# Altium PCB FCM_Integrated.PcbDoc (part 2 of 3)
Units mil, origin at the board's own origin, x right, y up, seen from the top; angles counter-clockwise.
Board outline 5855 x 4354 mil, 4 copper layers (Top Layer, Power, Ground, Bottom Layer), stack 23.756 mil thick; 164 components, 92 nets, 619 pads, 176 vias.
Unrouted connection lines stored in the file: 150.
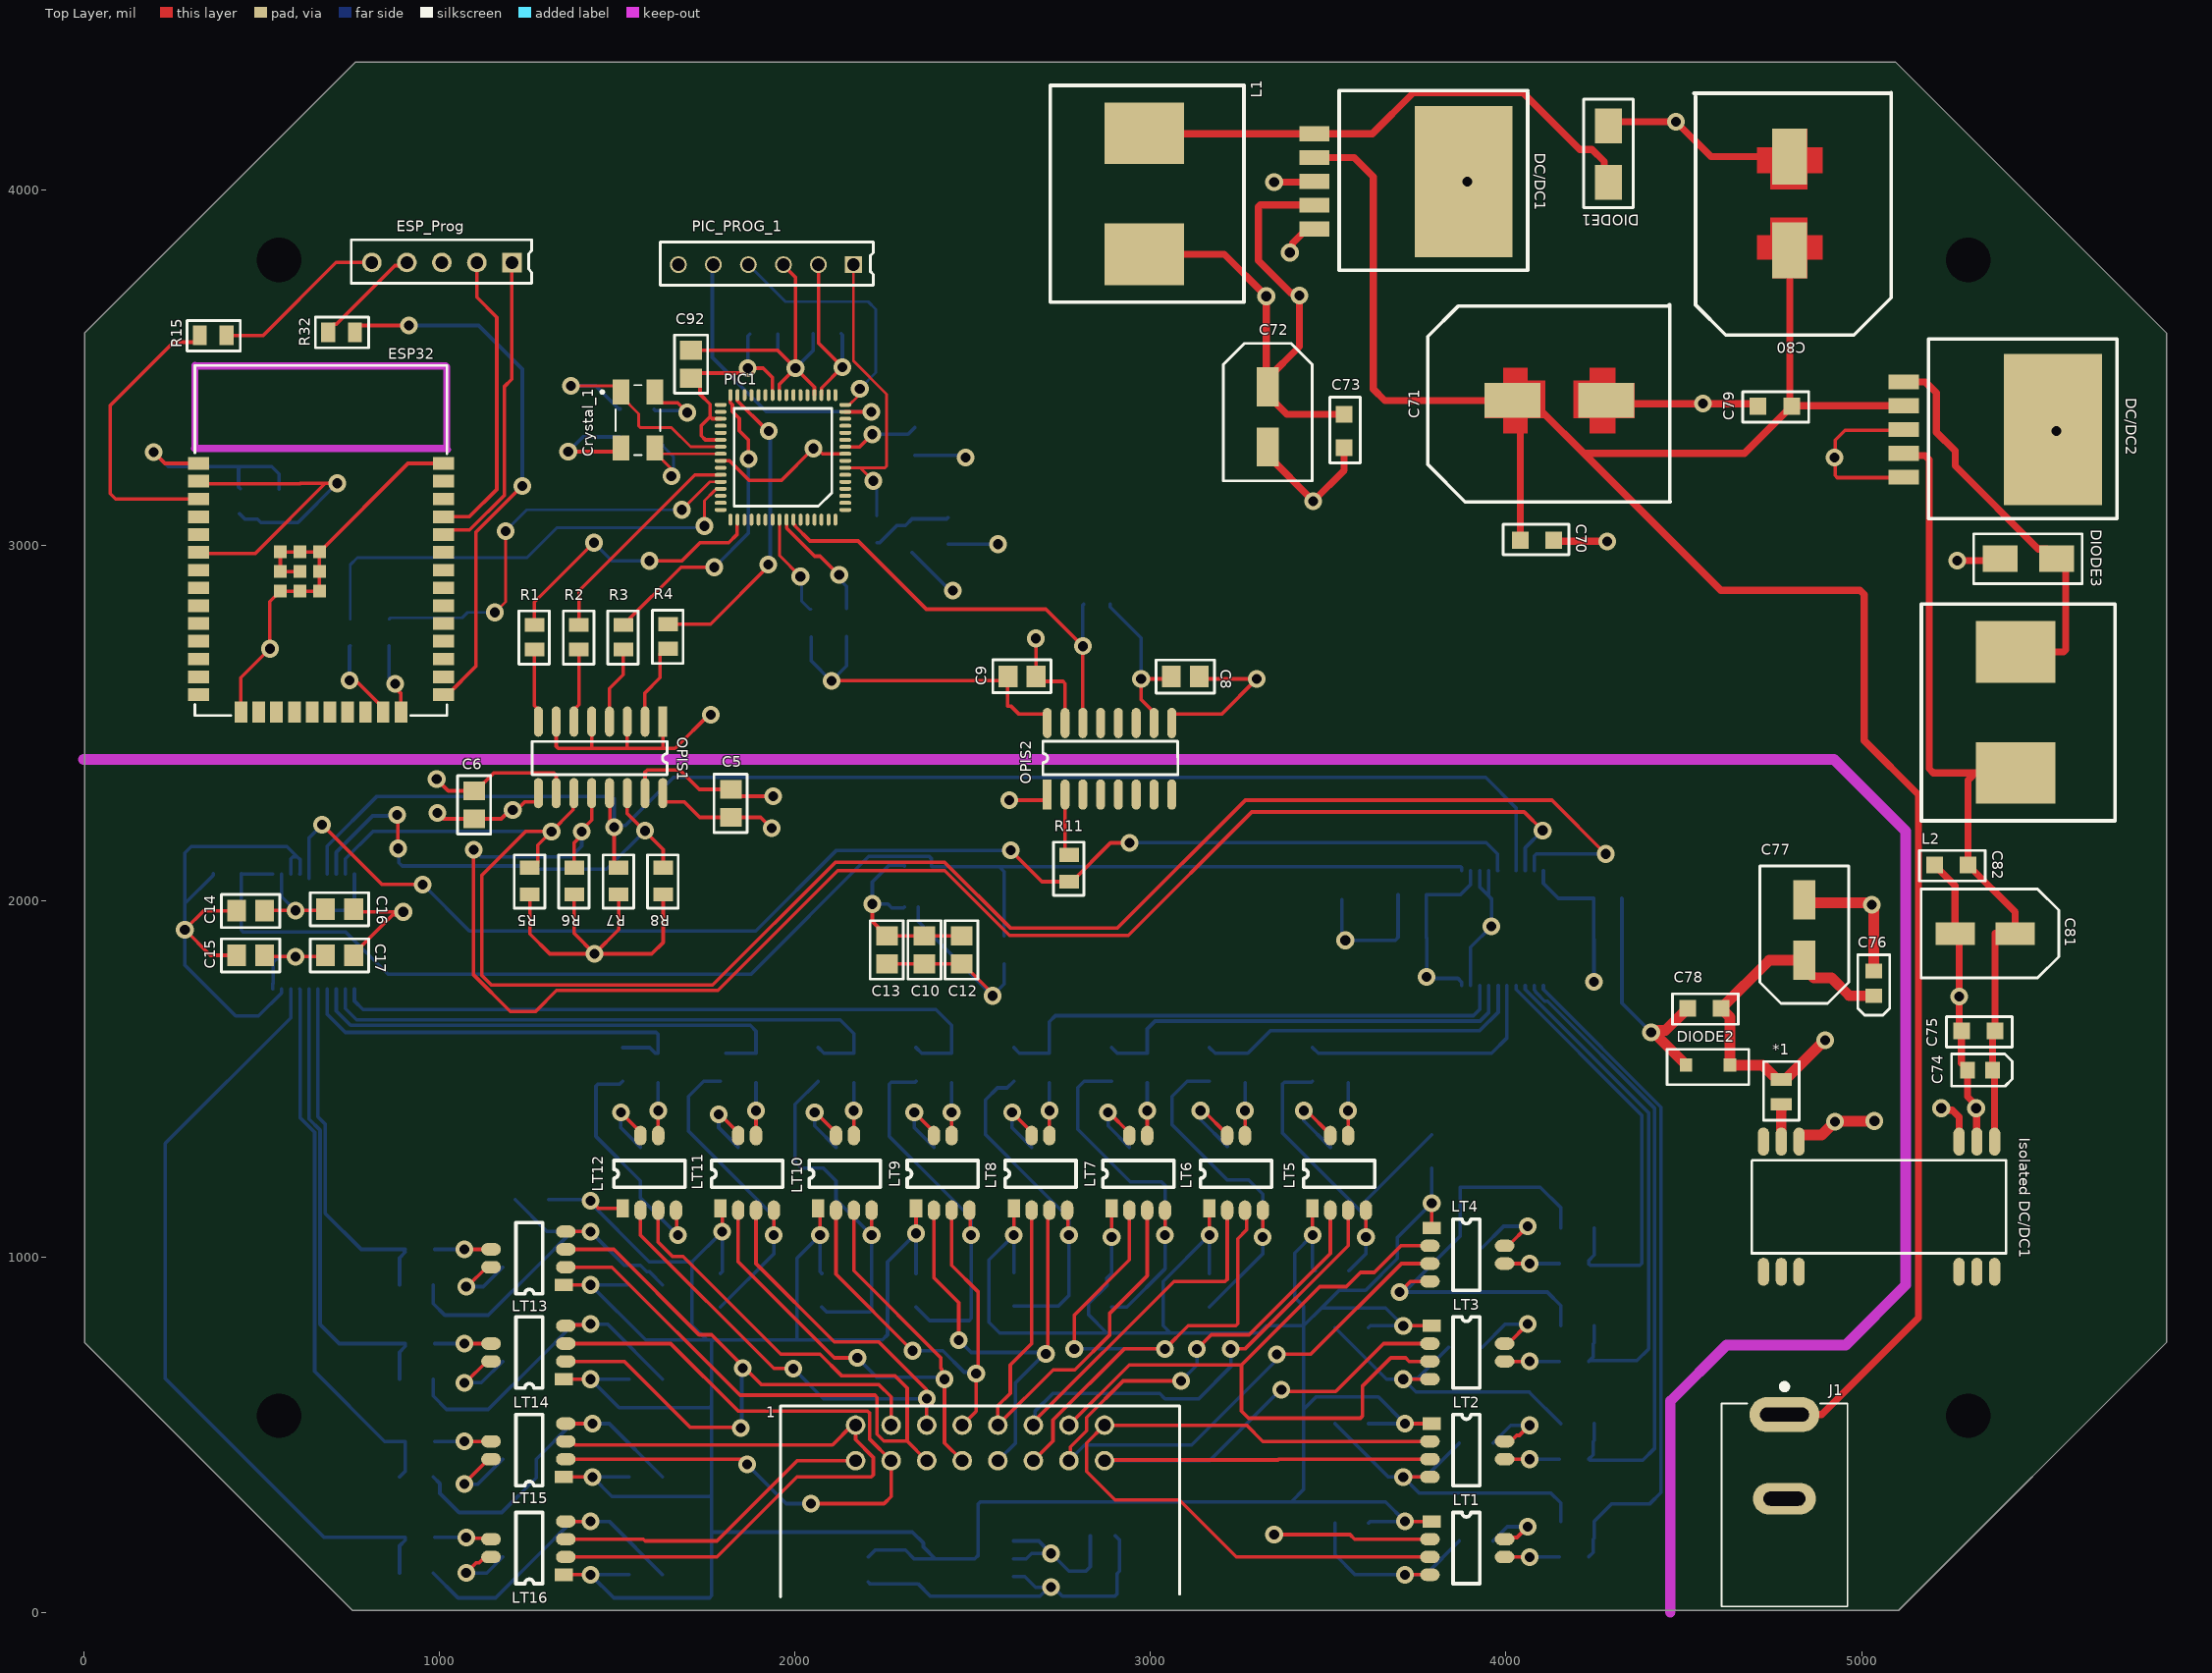
[diagram p0: Top Layer view]

## Part data (continued)
U1: "Precision Micropower, Low Dropout Voltage Reference, 2.048 V Output, 2.3 to 15 V Supply, Industrial, 8-pin SOIC (R-8), Reel", Manufacturer="Analog Devices", Operating Temp Range="-40 to 85 degC", Code_JEDEC=MS-012-AA, ComponentLink1Description="Manufacturer URL", ComponentLink1URL=http://www.analog.com/en/index.html, ComponentLink2Description=Datasheet, ComponentLink2URL=http://www.analog.com/static/imported-files/data_sheets/REF19xSeries.pdf, ComponentLink3Description="Package Specification", ComponentLink3URL=http://www.analog.com/static/imported-files/packages/PKG_PDF/SOIC_Narrow%20(R)/R_8.pdf, ComponentLink4Description="URL Link1", ComponentLink4URL="Product URL:http://www.analog.com/en/special-linear-functions/voltage-references/ref191/products/product.html", DatasheetVersion="Rev. L", Mounting Technology="Surface Mount", PackageDescription="8-Pin Standard Small Outline Package, Body 4.9 x 3.9 mm, Pitch 1.27 mm", PackageReference=R-8, PackageVersion="060506-A, 06/2006", Packing=Reel, PartNumber=REF191GSZ-REEL, Ref Out TC (ppm/C)=10, Vout=2.048V
Vref_1: library part MAX6037AAUKADJ+T, "IC VREF SERIES ADJ 0.2% SOT23-5", Case/Package=SOT-23-5, Manufacturer=Maxim, Max Input Voltage=5.5V, Max Operating Temperature=125°C, Max Output Current=5mA, Max Output Voltage=5V, Max Supply Current=250uA, Min Operating Temperature=-40°C, Min Output Voltage=1.184V, Package Quantity=1, Supplier Part Number 1=MAX6037AAUKADJ+TCT-ND, Temperature Coefficient=25ppm/°C, Tolerance=0.2%, Category="Voltage References", ComponentLink1Description=https://datasheet.ciiva.com/2008/max6037-max6037c-2008462.pdf?src-supplier=Digi-Key, ComponentLink1URL=https://datasheet.ciiva.com/2008/max6037-max6037c-2008462.pdf?src-supplier=Digi-Key, ComponentLink2Description=https://datasheet.ciiva.com/2008/max6037-max6037c-2008463.pdf?src-supplier=Digi-Key, ComponentLink2URL=https://datasheet.ciiva.com/2008/max6037-max6037c-2008463.pdf?src-supplier=Digi-Key, ComponentLink3Description=https://datasheet.ciiva.com/2008/max6037-max6037c-2008461.pdf?src-supplier=Digi-Key, ComponentLink3URL=https://datasheet.ciiva.com/2008/max6037-max6037c-2008461.pdf?src-supplier=Digi-Key, Lead Free="Lead Free", Manufacturer Part Number=MAX6037AAUKADJ+T, Mount="Surface Mount", Number of Pins=5, Operating Supply Current=250uA, Output Current=5mA, Output Type=Adjustable, Output Voltage=5V, Packaging="Tape and Reel", Radiation Hardening=No, REACH SVHC=Unknown, Reference Type=Series,Adjustable, Reference Voltage=5V, RoHS=Yes, RoHS Compliant=Yes, Series=-, Supplier 1=Digi-Key, Weight=0.001058oz

## Free pads (board coordinates)
  rect 40x40 smd far side: 1(1906,224) 1(3229,311)
  round 60 hole 125: 2(550,553) 3(550,3803) 3(5300,553) 3(5300,3803)

## Via types
v1: diameter 50, hole 28, Top Layer to Bottom Layer, 176 vias

## Nets (pads, with @x,y where several pads share a name; then routed paths per layer and width w, separated by ;. In a path a pad name is that pad's centre, name@x,y a point inside that pad or via, vN(x,y) a via of type N, cw(c..) or ccw(c..) an arc to the next point about the centre after c; other vN are vias at no path point)
2.048_VDC: C20.2 C21.1 C22.2 C25.2 C28.2 C31.2 C34.2 C37.2 C40.2 C43.2 C46.2 C48.2 C52.2 C54.2 C58.2 C60.2 C64.2 C66.2 LT1.1 LT2.1 LT3.1 LT4.1 LT5.1 LT6.1 LT7.1 LT8.1 LT9.1 LT10.1 LT11.1 LT12.1 LT13.1 LT14.1 LT15.1 LT16.1 pad.1 U1.6 | length 13046
  Top Layer w10: LT16.1@1351,106 v1(1426,106) ; LT15.1@1351,381 v1(1431,381) ; LT14.1@1351,656 v1(1426,656) ; LT13.1@1351,921 v1(1426,921) ; v1@1422.57,1161 1447.57,1136 LT12.1@1516,1136 ; LT11.1@1791,1136 1796,1131 v1(1796,1071) ; LT10.1@2066,1136 2071,1131 v1(2071,1061) ; v1(2341,1066) LT9.1@2341,1136 ; v1(2616,1061) LT8.1@2616,1136 ; v1(2891,1056) LT7.1@2891,1136 ; v1(3166,1061) LT6.1@3166,1136 ; v1(3456,1061) LT5.1@3456,1136 ; v1(3711,806) LT3.1@3791,806 ; v1(3716,256) LT1.1@3791,256 ; v1(3716,531) LT2.1@3791,531 ; LT4.1@3791,1081 v1(3791,1151)
  Bottom Layer w10: C64.2@1308.24,1161 v1@1416,1161 ; v1@1422.57,1161 v1@1416,1161 ; C66.2@1533.76,106 v1(1426,106) 1491,41 1760.14,41 1766,46.86 1766,226 ; C60.2@1533.76,381 v1(1431,381) 1486,326 1760.14,326 1766,331.86 ; C54.2@1533.76,656 v1(1426,656) 1506,576 1760.14,576 1766,581.86 ; C48.2@1533.76,921 v1(1426,921) 1581,766 1752.72,766 ; C58.2@1791,953.24 1796,958.24 v1(1796,1071) 1711,986 ; C52.2@2076,953.24 2071,958.24 v1(2071,1061) 2006,996 2006,766 ; C21.1@2206,156 2206.98,156 2226.22,175.24 C20.2@2311,175.24 2335.24,151 U1.6@2395.02,151 ; C46.2@2341,953.24 v1(2341,1066) 2261,986 2261,781 2246,766 2006,766 ; C43.2@2616,956 v1(2616,1061) 2546,991 2546,816 2576,786 2877.27,786 ; v1(2891,1056) C40.2@2891,953.24 2877.98,940.23 2877.98,920.48 2826,868.5 2826,837.27 2877.27,786 ; C37.2@3166,953.24 v1(3166,1061) 3036,931 3036,806 3056,786 ; C34.2@3463.76,961 3456,968.76 v1(3456,1061) 3406,1011 3406,886 3431,861 3431,806 ; C22.2@3613.24,251 3618.24,256 v1(3716,256) 3661,311 3396,311 ; C25.2@3613.24,531 v1(3716,531) 3641,606 3466,606 3431,571 ; C28.2@3613.24,801 3618.24,806 v1(3711,806) 3661,856 3481,856 ; C31.2@3791,1248.76 v1(3791,1151) 3694.24,1054.24 3694.24,995.1 3605.14,906 3531,906 3481,856 ; v1@1416,1161 1591,986 1711,986 ; 1711,986 1711,807.72 1752.72,766 ; 1752.72,766 1771,766 ; 1766,226 1906,226 2331,226 2361.7,195.3 2361.7,184.31 U1.6@2395.02,151 ; 1766,226 1766,331.86 ; 1766,331.86 1766,581.86 ; 1766,581.86 1766,761 1771,766 ; 1771,766 2006,766 ; U1.6@2395.02,151 U1.6@2426.51,151 2506,151 2516,161 2516,305.14 2521.86,311 pad.1@3229,311 3396,311 ; 2877.27,786 3056,786 ; 3056,786 3306,786 3326,806 3431,806 ; 3396,311 3431,346 3431,571 ; 3431,571 3431,806 ; 3431,806 3481,856
  other v1: 1426,1158
5VDC: "Isolated DC/DC1.1" C74.1 C75.2 C81.1 C82.2 DC/DC2.4 L2.2 | length 2362.3
  Top Layer w20: DC/DC2.4@5117.92,3259.07 5123.57,3253.42 5178.28,3253.42 5190,3241.71 5190,2372.72 5201.72,2361 5320,2361 ; 5374,1324 5374,1522 5368.06,1522 C74.1@5368.06,1525 5368.06,1627.75 C75.2@5375.31,1635 5375.31,1909 C81.1@5432,1909 5432,1969.25 C82.2@5299.25,2102 5299.25,2340.25 5320,2361 ; L2.2@5433,2361 5320,2361
+3V3: C7.1 C8.2 C9.2 C72.1 C73.2 C83.1 C85.1 C89.2 C90.2 C91.1 C92.2 DC/DC1.4 ESP32.2 L1.2 OPIS1.1 OPIS1.3 OPIS1.5 OPIS1.7 OPIS2.10 OPIS2.15 PIC1.10 PIC1.19 PIC1.26 PIC1.35 PIC1.38 PIC1.57 PIC_PROG_1.2 R9.2 R13.2 | length 6279.5
  Top Layer w10: ESP32.2@323.02,2981 326.02,2978 483,2978 680,3175 ; ESP32.2@323.02,3181 330.02,3174 609,3174 610,3175 680,3175 ; v1(713,3175) 680,3175 ; OPIS1.7@1329,2505 1329,2435.86 1334.86,2430 1426,2430 ; OPIS1.5@1429,2505 1429,2433 1426,2430 ; OPIS1.3@1529,2505 1529,2432 1531,2430 ; OPIS1.1@1629,2505 1629,2430 ; v1(1764,2524) 1761,2527 1664,2430 1629,2430 ; PIC1.38@1791.61,3297.37 1748.63,3297.37 1737,3309 1737,3337.28 1762,3362.28 ; PIC1.35@1791.61,3356.43 1791.41,3356.62 1767.66,3356.62 1762,3362.28 ; PIC1.26@1937.28,3423.35 1937.28,3472.72 1911,3499 1857.18,3499 1843.18,3485 1722.37,3485 C92.2@1708,3470.63 1711.94,3470.63 1733.51,3449.06 1733.51,3425.49 1762,3397 1762,3362.28 ; PIC1.57@1976.65,3072.96 1976.84,3072.76 1976.84,3049.02 2055.86,2970 2071,2970 v1@2123,2918 ; PIC_PROG_1.2@2066.43,3790 2066.43,3569.57 v1(2134,3502) 2075.27,3443.27 2075.27,3423.55 PIC1.19@2075.07,3423.35 ; PIC1.10@2142,3277.69 2182.69,3277.69 v1(2218,3313) ; v1(2678,2739) 2678,2632.37 2692.37,2618 2754.14,2618 2760,2612.14 OPIS2.15@2760,2501 ; OPIS2.10@3010,2501 3010,2530.92 2974,2566.92 v1(2974,2625) 3051.63,2625 C8.2@3058.63,2632 ; C72.1@3330,3423.02 C72.1@3330,3446.65 ; 1426,2430 1531,2430 ; 1531,2430 1629,2430
  Top Layer w20: L1.2@2983,3819 3208,3819 v1(3326,3701) 3326,3450.65 C72.1@3330,3446.65 3330,3470.27 3419,3559.27 v1(3419,3703) 3411.35,3710.65 3394.35,3710.65 3304,3801 3304,3943 3303.14,3943.86 3303.14,3952.14 3309,3958 3459.99,3958 DC/DC1.4@3460.92,3957.07 ; C72.1@3330,3423.02 3383.78,3369.25 C73.2@3545,3369.25
  Bottom Layer w10: C83.1@438,3090 453.67,3074.33 489.21,3074.33 498.79,3064.76 C7.1@550,3064.76 602.76,3064.76 v1(713,3175) ; v1(1868,3499) 1868,3589.37 C90.2@1873.63,3595 ; v1@2123,2918 2125,2917 2125,2906.18 2146,2885.18 C89.2@2146,2823.37 ; C91.1@2130.37,3596 2134,3592.37 v1(2134,3502) ; v1(2218,3313) 2318.63,3313 C85.1@2338,3332.37 ; R13.2@2431,3004 v1(2571,3004) ; R9.2@2887,2835 2887,2827.13 2974,2740.13 v1(2974,2625)
  other v1: 2125,2918